# Altium PCB Board_2.PcbDoc
Units mm, origin at the board's own origin, x right, y up, seen from the top; angles counter-clockwise.
Board outline 40 x 40 mm, 2 copper layers (Top Layer, Bottom Layer); 33 components, 24 nets, 93 pads, 8 vias.
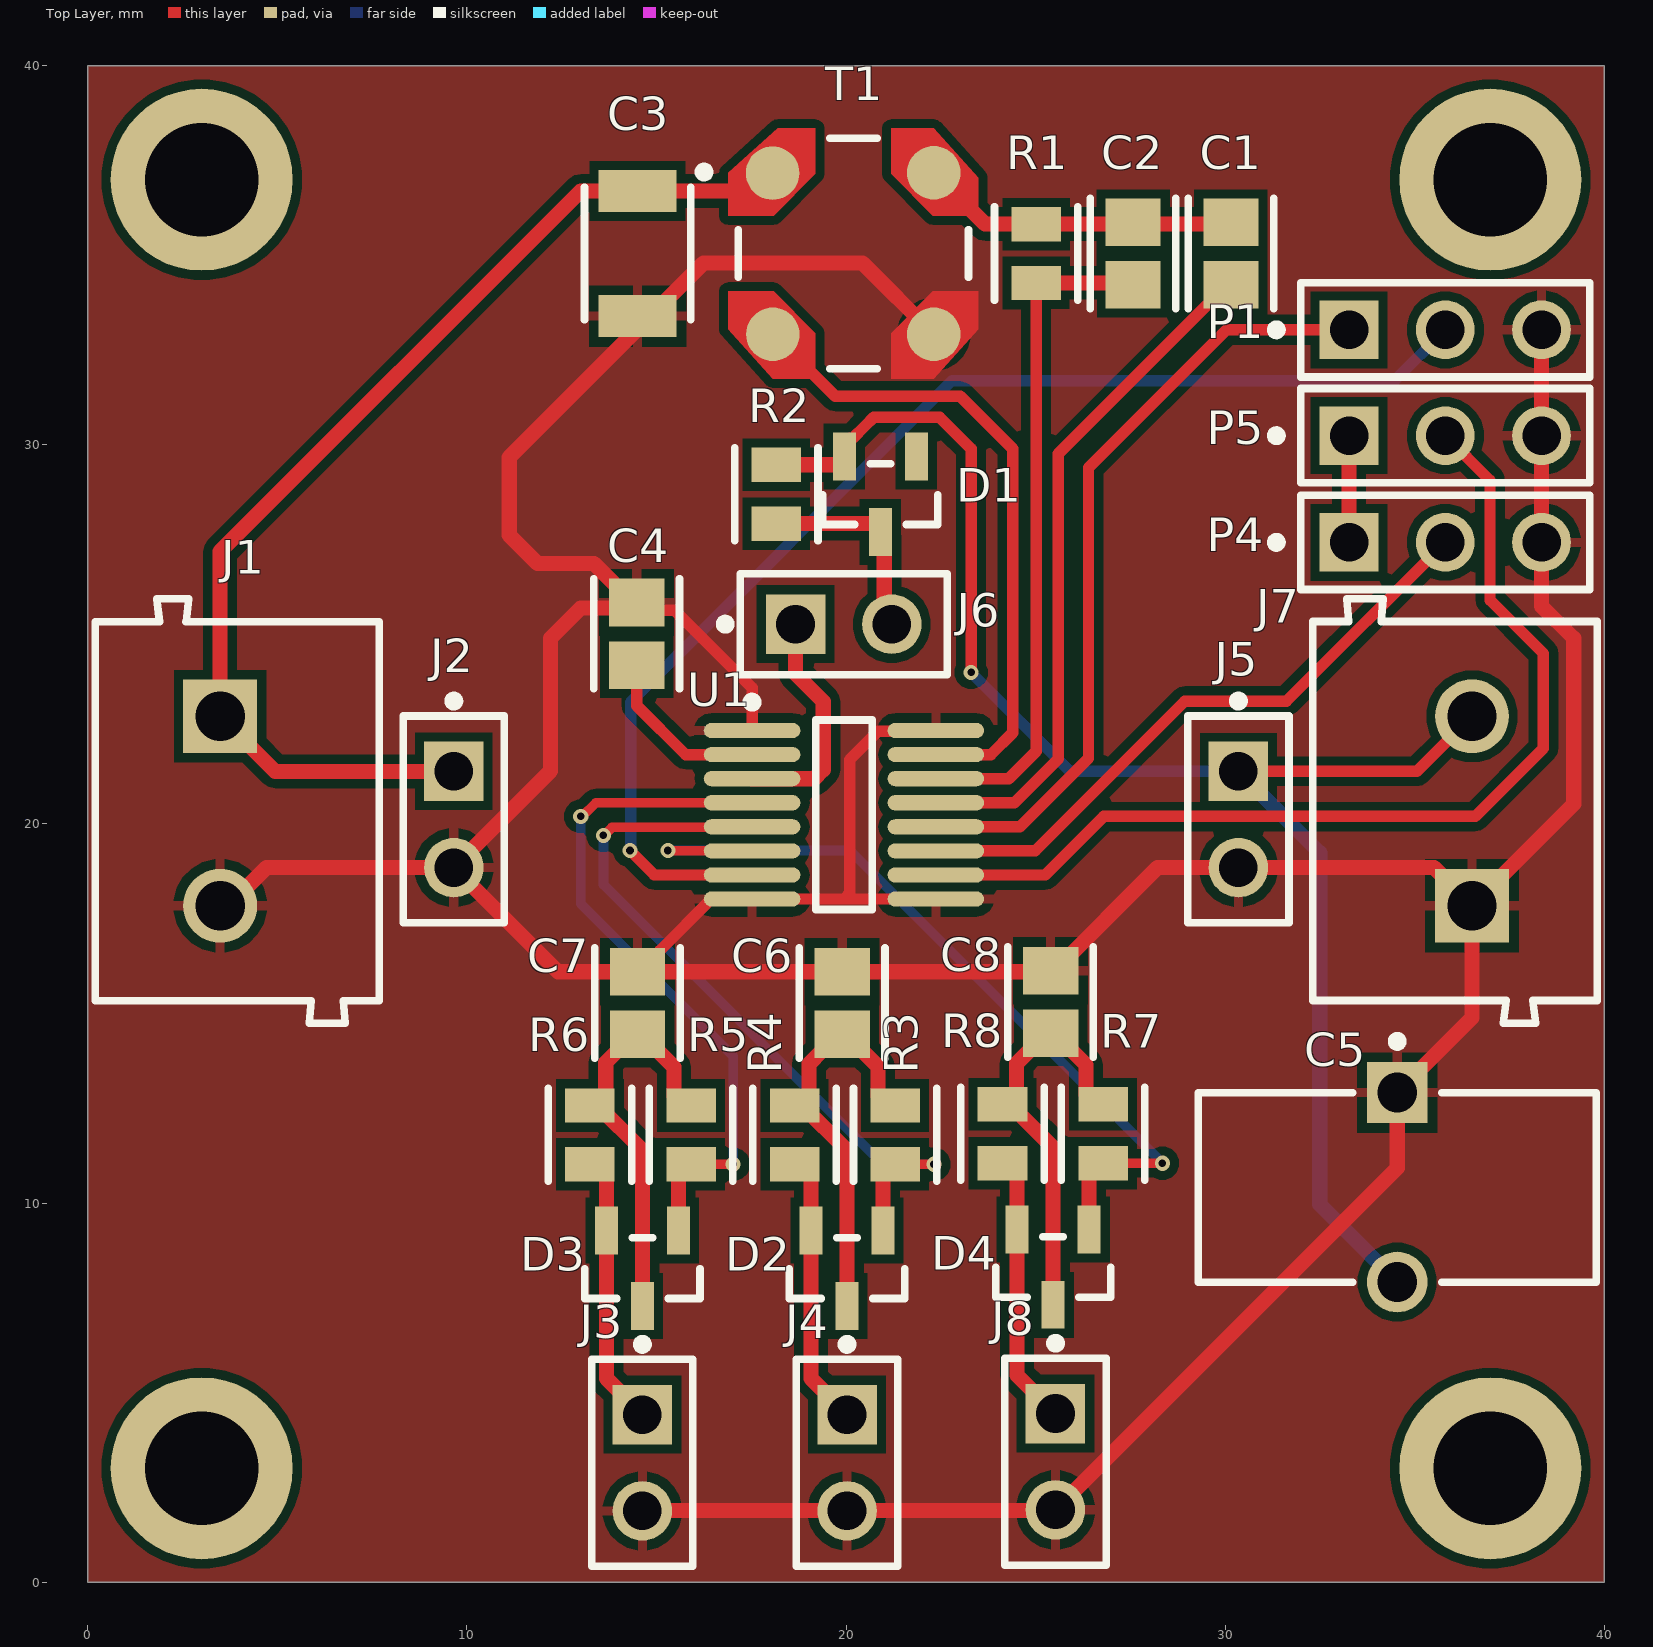
[diagram p0: Top Layer view]
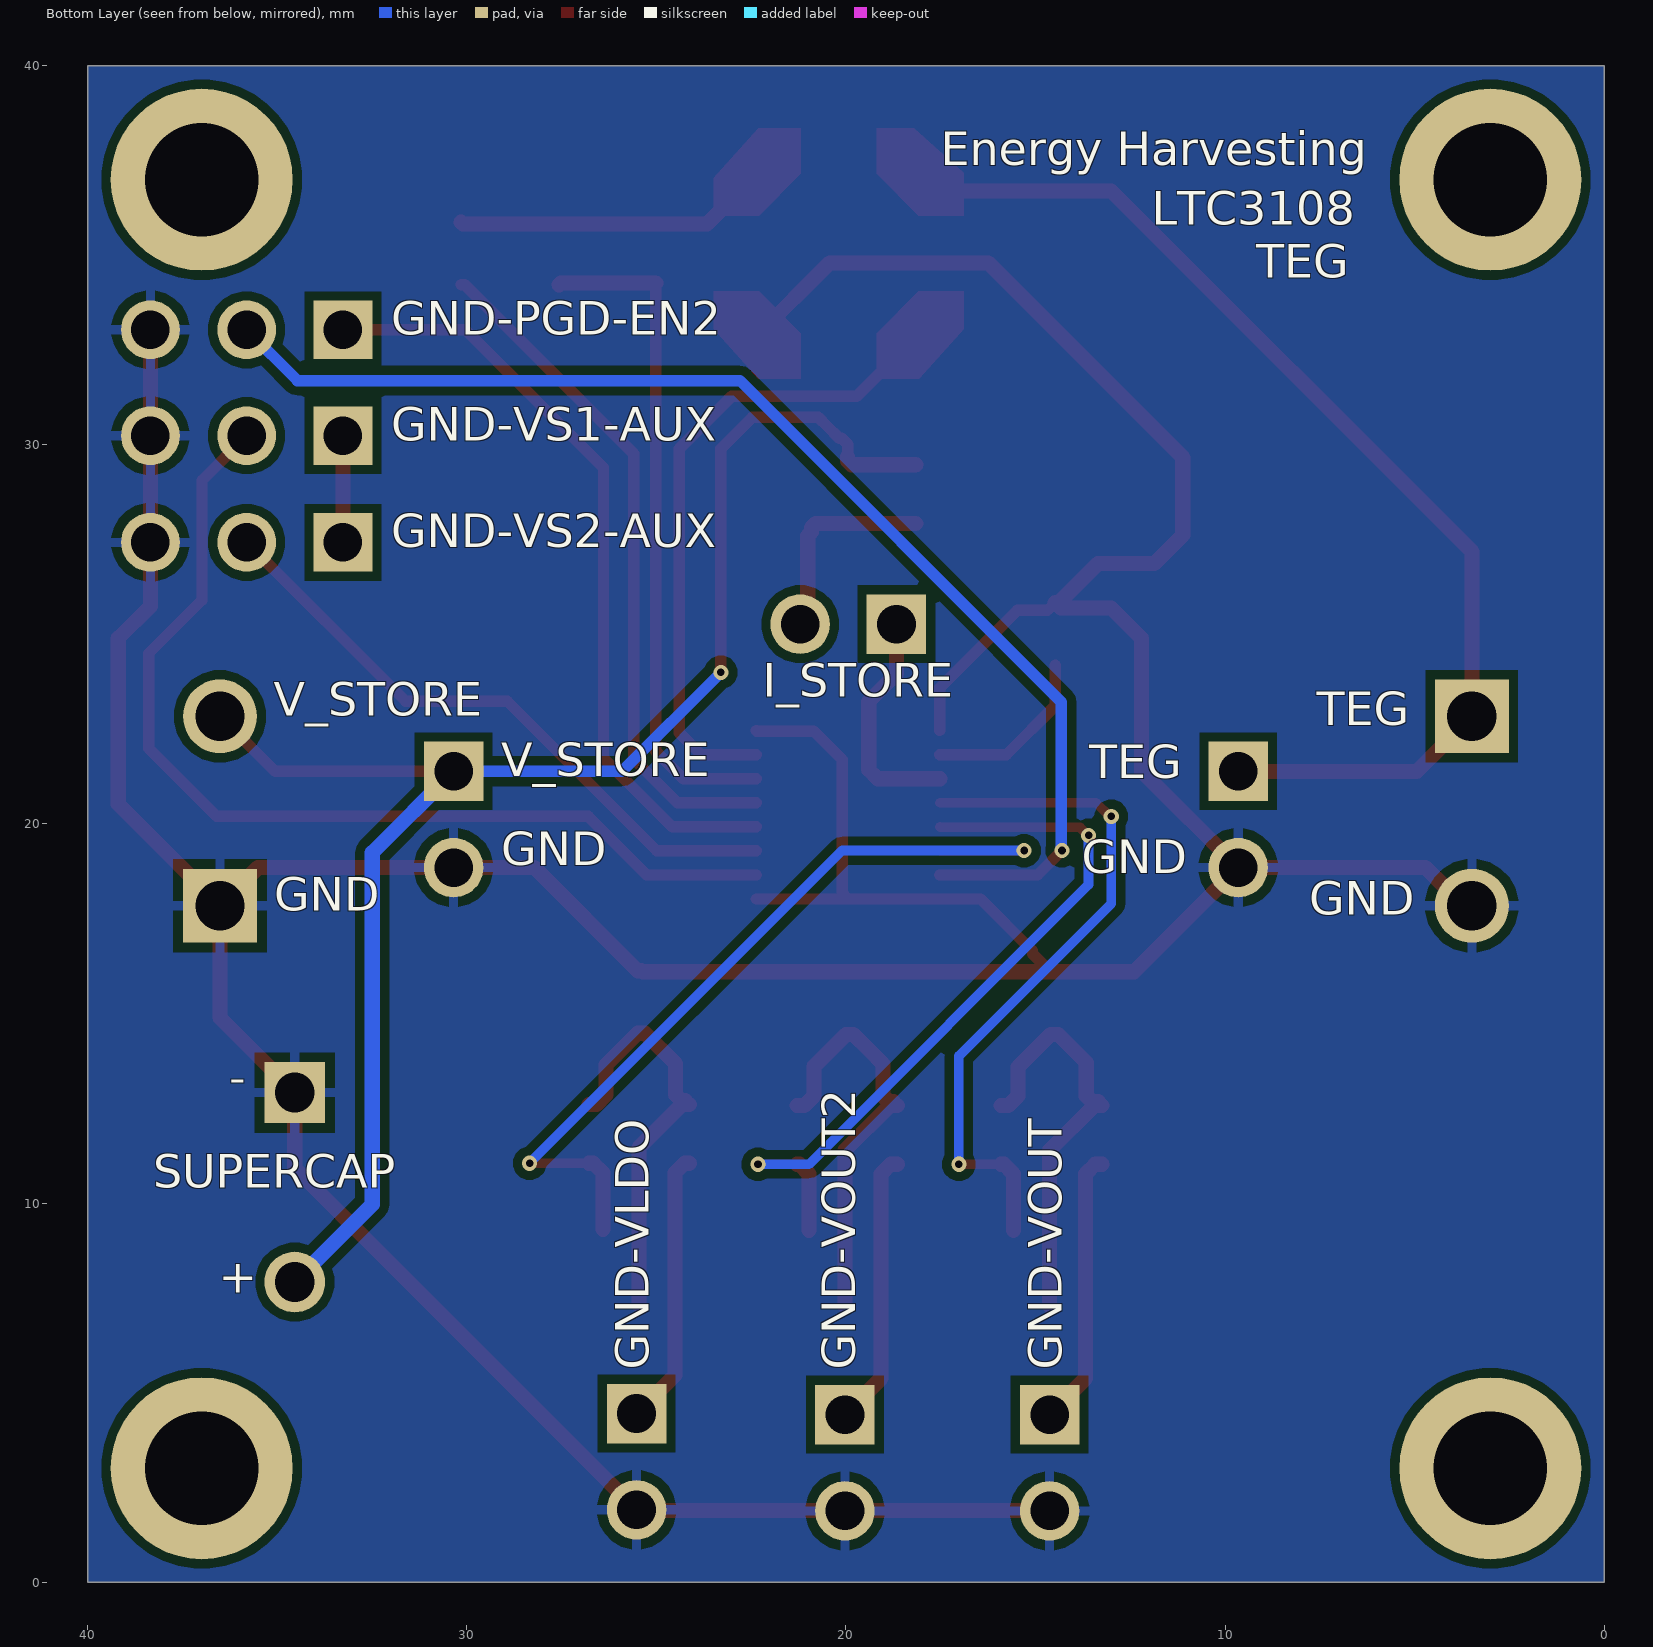
[diagram p1: Bottom Layer view, seen from below]
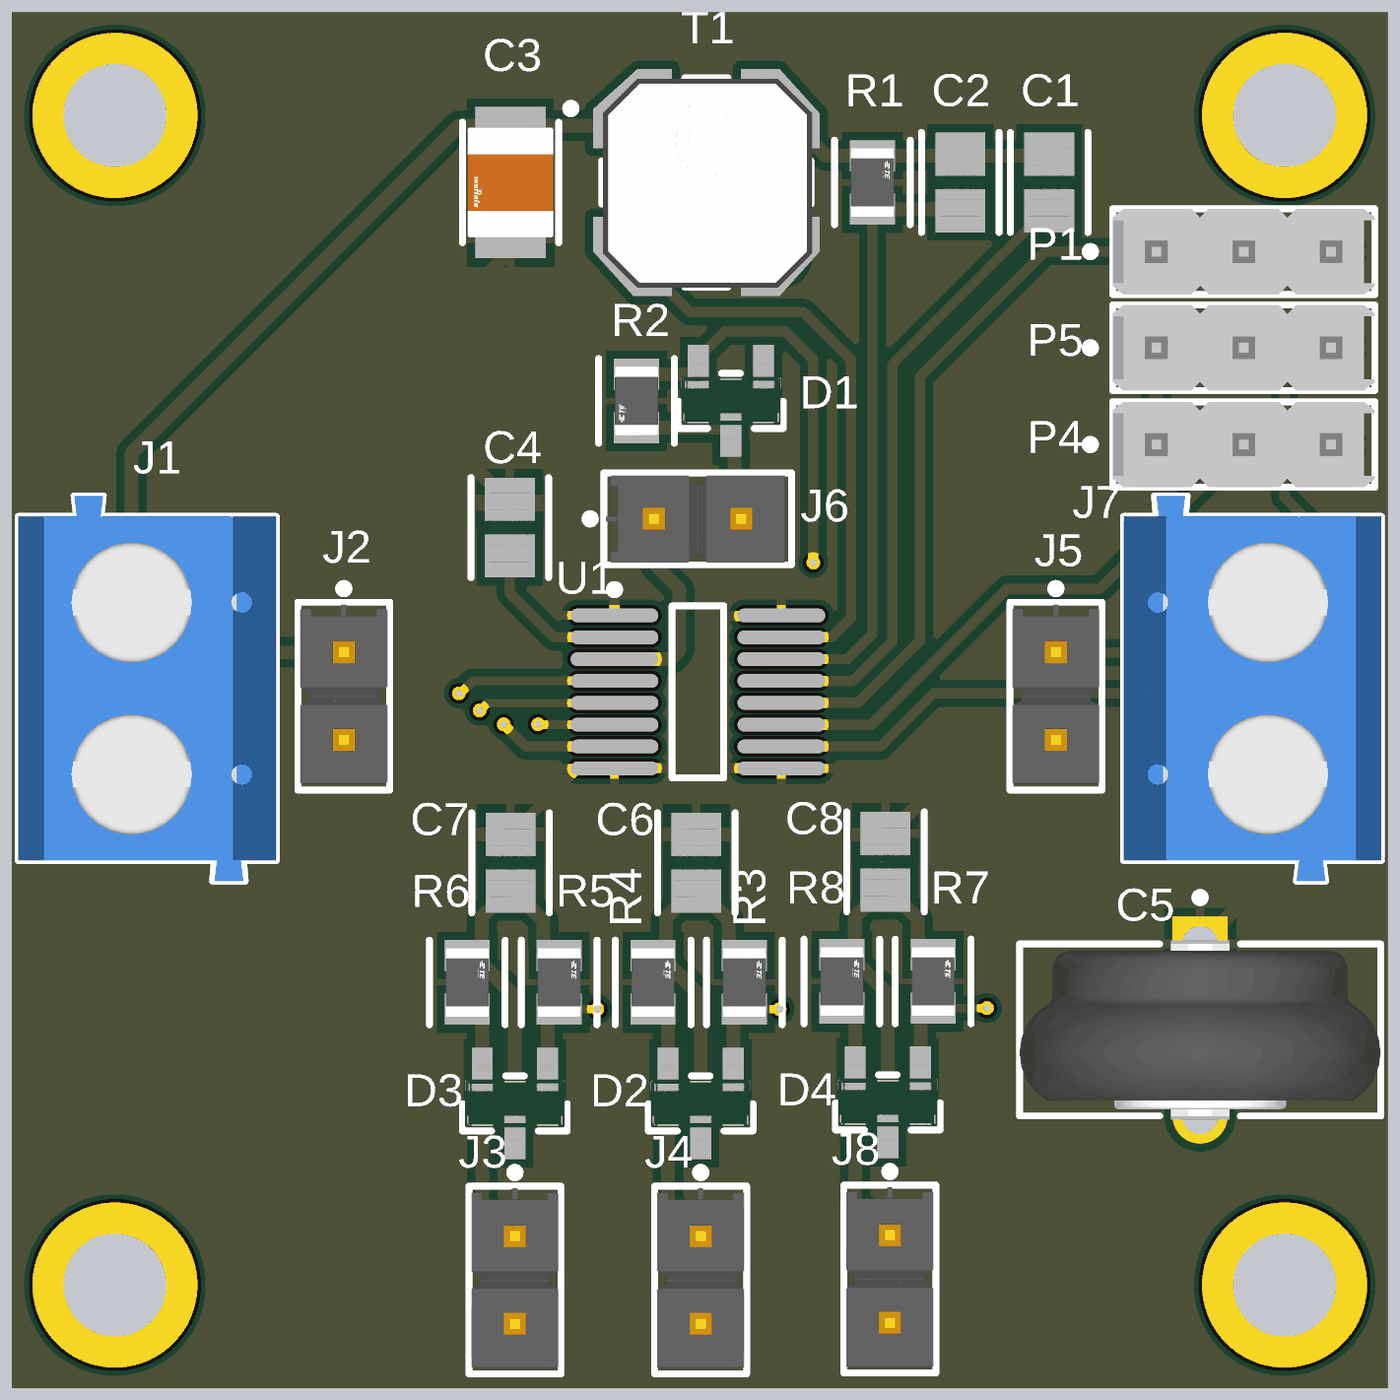
[diagram p2: 3D render of the assembled board from above, using the file's embedded part models]

## Layer stack, top to bottom
Top Solder: solder mask 0.0102, Solder Resist, Dk 3.5
Top Layer: signal copper 0.0356
Dielectric 1: dielectric 0.32, FR-4, Dk 4.8
Bottom Layer: signal copper 0.0356
Bottom Solder: solder mask 0.0102, Solder Resist, Dk 3.5

## Board outline
0,0 0,40 40,40 40,0

## Design rules (kind name [scope] priority, off if disabled: settings)
Clearance [All] p1: gap=0.235 ignorepadtopadclearanceinfootprint=FALSE
HoleSize [All] p1: absolutevalues=TRUE maxlimit=3 minlimit=0.025 maxpercent=80.000 minpercent=20.000
MinimumSolderMaskSliver [All] p1: minsoldermaskwidth=0.03
PolygonConnect [All] p1: connectstyle=Relief reliefconductorwidth=0.254 reliefentries=4 polygonreliefangle="90 Angle" airgapwidth=0.254
RoutingVias [All] p1: holewidth=0.2 width=0.4 viastyle="Through Hole" minholewidth=0.2 minwidth=0.4 maxholewidth=3 maxwidth=5
SilkToSilkClearance [All] p1: silktosilkclearance=0.02
SilkToSolderMaskClearance [IsPad] p1: minsilkscreentomaskgap=0.03 clearancetoexposedcopper=TRUE
SolderMaskExpansion [All] p1: expansion=0.102 istentingtop=FALSE
Width [All] p1: maxlimit=0.4 minlimit=0.254 preferedwidth=0.3
26 further rules are at their usual default settings.

## Components (designator, comment, footprint, x,y, rotation, side; value= is the part's Value field where it differs from the comment)
C1 "1nF" FP-CL21-IPC_B 30.158,35.052 r270 top
C2 "330pF" FP-CL21-IPC_B 27.574,35.052 r270 top
C3 "330uF" FP-GRM32E-0_3-MFG 14.5,35.052 r270 top
C4 "10uF" FP-CL21-IPC_B 14.478,25.019 r90 top
C5 "EECS0HD224V" FP-EECS0HD224V-MFG 34.544,10.414 r270 top
C6 "C" FP-CL21-IPC_B 19.9,15.274 r90 top
C7 "C" FP-CL21-IPC_B 14.5,15.274 r90 top
C8 "C" FP-CL21-IPC_B 25.4,15.303 r90 top
D1 "BAR43SFILM" FP-SOT23-3L-MFG 20.906,28.702 r270 top value=7pF
D2 "BAR43SFILM" FP-SOT23-3L-MFG 20.027,8.279 r270 top value=7pF
D3 "BAR43SFILM" FP-SOT23-3L-MFG 14.627,8.279 r270 top value=7pF
D4 "BAR43SFILM" FP-SOT23-3L-MFG 25.466,8.308 r270 top value=7pF
J1 "TEG" 691102710002 3.937,20.342 r270 top
J2 "TEG_test" FP-TSW-102-07-L-S-MFG 9.652,20.12 r270 top
J3 "VOUT" FP-TSW-102-07-L-S-MFG 14.627,3.146 r270 top
J4 "VOUT2" FP-TSW-102-07-L-S-MFG 20.027,3.146 r270 top
J5 "Vstore_test_V" FP-TSW-102-07-L-S-MFG 30.353,20.12 r270 top
J6 "Vstore_test_I" FP-TSW-102-07-L-S-MFG 19.939,25.273 r0 top
J7 "SuperCap" 691102710002 36.068,20.342 r90 top
J8 "VLDO" FP-TSW-102-07-L-S-MFG 25.527,3.175 r270 top
P1 "PGD" MOLX-22-28-4033_V 35.814,33.04 r0 top
P4 "VS1 JMP" MOLX-22-28-4033_V 35.814,27.432 r0 top
P5 "VS2 JMP" MOLX-22-28-4033_V 35.814,30.246 r0 top
R1 "500k" FP-RP732A-IPC_C 25.019,35.052 r270 top
R2 "0R" FP-RP732A-IPC_C 18.161,28.702 r90 top
R3 "0R" FP-RP732A-IPC_C 21.297,11.798 r270 top
R4 "0R" FP-RP732A-IPC_C 18.643,11.798 r270 top
R5 "0R" FP-RP732A-IPC_C 15.912,11.798 r270 top
R6 "0R" FP-RP732A-IPC_C 13.243,11.798 r270 top
R7 "0R" FP-RP732A-IPC_C 26.784,11.827 r270 top
R8 "0R" FP-RP732A-IPC_C 24.13,11.827 r270 top
T1 "LPR6235-253LMLB" FP-LPR6235-MFG 20.193,35.052 r0 top
U1 "LTC3108EGN#PBF" LT-GN-16_M 19.947,20.243 r0 top

## Footprints (in the part's own frame and the unit in brackets; to place one, negate y for a bottom-side part, rotate by r counter-clockwise, add the part's x,y. Pads: shape width x height; smd on the part's side, far side on the other; paste and mask are expansions set on the pad)
691102710002 [mm] "5,00mm - modular - blue - Horizontal entry with pressure clamp - 9,9 mm height - 02p"
  rect 1.95x1.95 hole 1.3: 1(-2.5,-0.45)
  round 1.95 hole 1.3: 2(2.5,-0.45)
  silkscreen extent -5.6,-3.75 5.6,3.75, body extent -5.6,-3.75 5.6,3.75, height 9.96
FP-CL21-IPC_B [mm]
  rect 1.255x1.456 smd paste+0 mask+0: 1(-0.826,0) 2(0.826,0)
  silkscreen extent -1.45,-1.13 1.45,1.13, body extent -1.7,-0.98 1.7,0.98, height 0.25
FP-EECS0HD224V-MFG [mm]
  rect 1.6x1.6 hole 1.05 paste-1000 mask+0: 1(-2.5,0)
  round 1.6 hole 1.05 paste-1000 mask+0: 2(2.5,0)
  silkscreen extent -3.97,-5.25 2.5,5.25, body extent -3.4,-5.35 3.4,5.35, height 0.25
FP-GRM32E-0_3-MFG [mm]
  rect 1.1x2.05 smd paste+0 mask+0: 1(-1.65,0) 2(1.65,0)
  silkscreen extent -1.75,-1.4 1.75,1.4, body extent -2.3,-1.5 2.3,1.5, height 0.25
FP-LPR6235-MFG [mm]
  round 1.413 smd paste+0 mask+0: 1(-2.131,2.123) 2(-2.123,-2.131) 3(2.123,-2.131) 4(2.123,2.131)
  Top Layer region: -3.3,-1 -2.1,-1 -1,-2.1 -1,-3.3 -2.125,-3.3 -3.3,-2 -3.3,-1
  Top Layer region: 3.3,-1 2.1,-1 1,-2.1 1,-3.3 2.125,-3.3 3.3,-2 3.3,-1
  Top Layer region: 3.3,1 2.1,1 1,2.1 1,3.3 2.125,3.3 3.3,2 3.3,1
  Top Layer region: -1,3.3 -1,2.1 -2.1,1 -3.3,1 -3.3,2.125 -2,3.3 -1,3.3
  silkscreen extent -4.06,-3.04 3.04,3.04, body extent -3.4,-3.4 3.4,3.4, height 0.25
FP-RP732A-IPC_C [mm]
  rect 0.906x1.308 smd paste+0 mask+0: 1(-0.776,0) 2(0.776,0)
  silkscreen extent -1.23,-1.1 1.23,1.1, body extent -1.33,-0.8 1.33,0.8, height 0.25
FP-SOT23-3L-MFG [mm]
  rect 1.26x0.61 smd paste+0 mask+0: 1(-0.995,0.95) 2(-0.995,-0.95) 3(0.995,0)
  silkscreen extent -0.8,-1.52 0.8,1.52, body extent -1.73,-1.62 1.73,1.62, height 0.25
FP-TSW-102-07-L-S-MFG [mm]
  rect 1.57x1.57 hole 1.02 paste-1000 mask+0: 1(-1.27,0)
  round 1.57 hole 1.02 paste-1000 mask+0: 2(1.27,0)
  silkscreen extent -3.25,-1.34 2.73,1.34, body extent -2.83,-1.44 2.83,1.44, height 0.25
LT-GN-16_M [mm] "SOP, 16-Leads, Body 5x4mm, Pitch 0.635mm, IPC Low Density"
  oval 2.55x0.4 smd: 1(-2.425,2.222) 2(-2.425,1.587) 3(-2.425,0.953) 4(-2.425,0.318) 5(-2.425,-0.318) 6(-2.425,-0.953) 7(-2.425,-1.587) 8(-2.425,-2.222) 9(2.425,-2.222) 10(2.425,-1.587) 11(2.425,-0.953) 12(2.425,-0.318) 13(2.425,0.318) 14(2.425,0.953) 15(2.425,1.587) 16(2.425,2.222)
  silkscreen extent -2.55,-2.5 0.75,3.1, body extent -2,-2.5 2,2.5, height 1.75
MOLX-22-28-4033_V [mm] "THD, 3-Leads, Body 7.62x2.49mm, Pitch 2.54mm"
  rect 1.55x1.55 hole 1.02: 1(-2.54,0)
  round 1.55 hole 1.02: 2(0,0) 3(2.54,0)
  silkscreen extent -4.58,-1.24 3.81,1.24, body extent -3.81,-1.24 3.81,1.24, height 8.38

## Part data
C1 C2 C4 C6 C7 C8: library part CMP-13271-001454-1, "CL21 Series 0805 22uF 6.3V ±20% Tolerance X5R Multilayer Ceramic Chip Capacitor", Capacitance=22uF, Case Code (Imperial)=0805, Case Code (Metric)=2012, Dielectric=X5R, Max Operating Temperature=85°C, Min Operating Temperature=-55°C, Package Quantity=1, Tolerance=20%, Voltage Rating=6.3V, Case/Package=0805, Depth=1.25mm, Height=0.85mm, Lead Free="Lead Free", Length=2mm, Mount="Surface Mount", Packaging="Tape and Reel", Radiation Hardening=No, Thickness=0.037inch, Width=0.049inch
C3: library part CMP-06035-014163-1, "Chip Multilayer Ceramic Capacitors for General Purpose, 1210, 330uF, X5R, 15%, 20%, 4V", Case Code (Imperial)=1210, Case Code (Metric)=3225, Dielectric=X5R, Max Operating Temperature=85°C, Min Operating Temperature=-55°C, Tolerance=20%, Voltage Rating=4V, Capacitance=330uF, Case/Package=1210, Length=0.126inch, Mount="Surface Mount", Packaging="Tape and Reel", Thickness=0.11inch, Voltage Rating (DC)=4V, Width=0.098inch
C5: library part CMP-05436-000001-1, "CAP 220MF -20% +80% 5.5V T/H", Capacitance=220mF, Case/Package=Radial, Dielectric Material=Aluminium, ESR (Equivalent Series Resistance)=75R, Max Operating Temperature=70°C, Min Operating Temperature=-25°C, Package Quantity=200, Tolerance=80%, Voltage=500V, Voltage Rating=5.5V, Body Diameter=10.5mm, Construction=Cylindrical, Depth=5mm, Diameter=10.5mm, Height=11.5mm, Height - Seated (Max)=0.453inch, Lead Diameter=0.8mm, Lead Free="Lead Free", Lead Length=3mm, Lead Pitch=5mm, Length=11.5mm, Life (Hours)=1000Hour, Mount="Through Hole", Packaging=Bulk, Radiation Hardening=No, REACH SVHC="No SVHC", RoHS Compliant=Yes, Series=SD, Termination="Through Hole", Voltage Rating (DC)=5.5V, Width=5mm
D1 D2 D3 D4: library part CMP-2000-05915-2, "DIODE ARRAY SCHOTTKY 30V SOT23-3", Capacitance=7pF, Forward Current=0.1A, Manufacturer=STMicroelectronics, Max Junction Temp=+150°C, Max Repetitive Reverse Voltage=30V, Max Surge Forward Current=0.75A, Package=SOT23-3L, Peak Reverse Current=0.5uA, Temperature="to +150°C", Automotive=No, Category=Diode, ComponentLink2Description=Datasheet, ComponentLink2URL=https://www.st.com/resource/en/datasheet/bar43.pdf, Device Class L1="Discrete Semiconductors", Device Class L2=Diodes, Device Class L3="Schottky Diodes", Digikey Description="DIODE ARRAY SCHOTTKY 30V SOT23-3", Height=1.5mm, Lead Free=Yes, Manufacturer Part Number=BAR43SFILM, Mouser Description="Schottky Diodes & Rectifiers 100mA 30 Volt", Octopart=https://octopart.com/bar43sfilm-stmicroelectronics-39549077, RoHS=TRUE, Standoff Height=0mm, Temperature Range High=+150°C
J1 J7: library part CMP-1502-03258-1, "Series 102 - 5.00 mm Horizontal Entry Modular with Pressure Clamp WR-TBL, 2 pin", Manufacturer="Wurth Elektronik", Operating Temperature=-40to105degC, Package Reference=691102710002, Datasheet URL=http://katalog.we-online.de/em/datasheet/6911027100xx.pdf, Manufacturer URL=http://www.we-online.de, Mounting Technology=THT, Packaging=Box, Part Number=691102710002, Pin Number=2, Pitch=5.00mm, Publisher=WurthElektronik
J2 J3 J4 J5 J6 J8: library part CMP-02766-001428-1, "CONN HEADER VERT 2POS 2.54MM", Color=Black, Current Rating=7.6A, Max Operating Temperature=125°C, Max Voltage Rating (AC)=550V, Min Operating Temperature=-55°C, Package Quantity=1, Connector Type="Male Pin", Contact Material=Bronze, Contact Mating Length=0.23inch, Contact Plating=Gold, Contact Type="Male Pin", Depth=2.54mm, Gender=Male, Housing Color=Black, Housing Material=Polyester, Lead Free="Lead Free", Length=5.08mm, Max Current Rating=7.6A, Mount="Through Hole", Number of Contacts=2, Number of Positions=2, Number of Rows=1, Orientation=Straight, Packaging=Bulk, Pitch=2.54mm, Radiation Hardening=No, REACH SVHC="No SVHC", RoHS Compliant=Yes, Series=TSW, Termination=Solder, Voltage Rating=550V, Width=2.54mm
P1 P4 P5: library part CMP-1676-00001-5, "Male Header, Pitch 2.54 mm, 1 x 3 Position, Height 8.38 mm, Tail Length 3.18 mm, RoHS, Bulk", Colour=Black, Current Rating="4 A", Manufacturer=Molex, Max Operating Temperature="75 degC", Min Operating Temperature="0 degC", Package Quantity=1, Voltage Rating="250 V", ComponentLink1Description="Manufacturer URL", ComponentLink1URL=http://www.molex.com/, ComponentLink2Description=Datasheet, ComponentLink2URL=http://www.molex.com/pdm_docs/sd/022284033_sd.pdf, Contact Finish=Gold, Contact Material=Brass, Contact Plating=Gold, DatasheetVersion="Rev. G, 01/2012", Height="8.38 mm", Lead Pitch="0.1 inch", Length="7.62 mm", Mount="Through Hole", Mounting Technology="Through Hole", PackageDescription="Male Header, Pitch 2.54 mm, 1 x 3 Position, Height 8.38 mm, Tail Length 3.18 mm", PackageReference=22-28-4033, Packaging=Bulk, Pins=3, REACH SVHC=Unknown, RoHSCompliant=true, Rows=1
R1 R2 R3 R4 R5 R6 R7 R8: library part CMP-03211-009539-2, "Surface Mount Resistors, Precision Resistor, 2 Terminations, Size Code 0805, Cut Tape Length, .1%, Thin Film, 10K 0.1% 10PPM", Case Code (Imperial)=0805, Case Code (Metric)=2012, Max Operating Temperature=155°C, Min Operating Temperature=-55°C, Number of Resistors=1, Package Quantity=1000, Power Rating=125mW, Resistance=39.2kR, Temperature Coefficient=15ppm/°C, Tolerance=0.1%, Voltage Rating=150V, Case/Package=0805, ELV=Compliant, Height=0.55mm, Length=2mm, Mount="Surface Mount", Number of Terminations=2, Packaging="Tape and Reel", Termination=Solder, Weight=0.000194oz, Width=1.25mm
T1: library part CMP-11284-000017-1, "Coupled Inductors Mini Step-up Xfmr SEE PART COMMENT TAB", Ambient Temperature Range High=+85°C, Ambient Temperature Range Low=-40°C, Frequency=100kHz, Inductance Primary=25uH, Isolation Voltage=300Vrms, Manufacturer=Coilcraft, Package=LPR6235, Primary Resistance=0.74Ω, Sec Resistance=13.7Ω, Automotive=No, Category=Trans, ComponentLink2Description=Datasheet, ComponentLink2URL=https://www.coilcraft.com/pdfs/lpr6235.pdf, Device Class L1="Passive Components", Device Class L2=Transformers, Device Class L3=unset, Height=3.5mm, Lead Free=Yes, Manufacturer Part Number=LPR6235-253LMLB, Mouser Description="Coupled Inductors Mini Step-up Xfmr SEE PART COMMENT TAB", Octopart=https://octopart.com/lpr6235-253lmlb-coilcraft-14935593, RoHS=TRUE, Turns Ratio=1:10
U1: library part CMP-0473-00093-1, "Ultralow Voltage Step-Up Converter and Power Manager, 16-pin SOP (GN-16), -40 to 125 degC, Pb-Free", Manufacturer="Linear Technology", ComponentLink1Description="Manufacturer URL", ComponentLink1URL=http://www.linear.com/, ComponentLink2Description=Datasheet, ComponentLink2URL=http://cds.linear.com/docs/en/datasheet/3108fb.pdf, ComponentLink3Description="Package Specification", ComponentLink3URL=http://cds.linear.com/docs/en/packaging/05081641_B_GN16.pdf, DatasheetVersion="Rev. B", Energy Source=Thermoelectric, Mounting Technology="Surface Mount", Number of Outputs=3, PackageDescription="16-Pin Plastic SSOP, Body 4.9 x 3.9 mm, Pitch 0.635 mm", PackageReference=GN-16, PackageVersion="Rev. B, 03/2012", PartNumber=LTC3108EGN#PBF, RoHS=TRUE, Topology="Boost, LDO", Vin Max(V)=0.5, Vin Min(V)=0.02, Vout Max(V)=5

## Free pads (board coordinates)
  round 4.8 hole 3: 5(3,3) 5(3,37) 5(37,3) 5(37,37)

## Via types
v1: diameter 0.4, hole 0.2, Top Layer to Bottom Layer, 8 vias

## Nets (pads, with @x,y where several pads share a name; then routed paths per layer and width w, separated by ;. In a path a pad name is that pad's centre, name@x,y a point inside that pad or via, vN(x,y) a via of type N, cw(c..) or ccw(c..) an arc to the next point about the centre after c; other vN are vias at no path point)
GND: C3.2 C4.2 C5.1 C6.2 C7.2 C8.2 J1.2 J2.2 J3.2 J4.2 J5.2 J7.1 J8.2 P1.3 P4.3 P5.3 T1.3 U1.1 U1.8 U1.9 U1.16 | length 134.2
  Top Layer w0.3: C4.2 14.686,25.636 15.48,25.636 17.522,23.595 U1.1 ; C7.2 14.601,16.1 15.078,16.577 15.078,16.652 16.447,18.021 U1.8 19.947,18.021 ; U1.9 19.947,18.021 ; U1.16 22.353,22.447 20.847,22.447 20.1,21.7 20.1,18.174 19.947,18.021
  Top Layer w0.4: J1.2 3.699,17.842 4.707,18.85 J2.2 ; C4.2@14.377,25.845 13.35,26.872 11.863,26.872 11.113,27.622 11.113,28.647 11.113,29.672 16.241,34.8 20.437,34.8 T1.3 ; C4.2 14.333,25.7 13,25.7 12.2,24.9 12.2,21.398 J2.2 ; C7.2 12.402,16.1 J2.2 ; C7.2@14.601,16.1 C6.2 25.371,16.1 C8.2 25.501,16.129 28.221,18.85 J5.2 35.511,18.85 J7.1 ; J3.2 14.642,1.891 25.513,1.891 J8.2 34.544,10.922 C5.1 36.518,14.888 J7.1 ; P1.3 P5.3 P4.3 38.354,25.746 39.2,24.9 39.2,20.524 J7.1
NetC1_1: C1.1 C2.1 R1.1 T1.4 | length 8.4
  Top Layer w0.4: T1.4 23.671,35.828 R1.1 30.108,35.828 C1.1
NetC1_2: C1.2 U1.13 | length 18.2
  Top Layer w0.3: U1.13 24.444,20.561 25.6,21.717 25.6,29.769 30.057,34.226 C1.2
NetC2_2: C2.2 R1.2 U1.14 | length 17.9
  Top Layer w0.3: U1.14 24.296,21.196 25.019,21.919 R1.2
  Top Layer w0.4: R1.2 27.525,34.276 C2.2
NetC3_1: C3.1 J1.1 J2.1 T1.1 | length 29.8
  Top Layer w0.4: J2.1 4.939,21.39 J1.1 3.487,27.187 13.002,36.702 14.975,36.702 17.314,36.702 17.788,37.175 T1.1
NetC4_1: C4.1 U1.2 | length 4.6
  Top Layer w0.3: C4.1 14.478,23.122 15.769,21.831 U1.2
NetC5_2: C5.2 D1.2 J5.1 J7.2 R2.2 | length 42.3
  Top Layer w0.3: D1.2 19.956,30.022 20.111,30.177 20.177,30.177 20.5,30.5 ; 20.5,30.5 20.731,30.731 22.469,30.731 23.3,29.9 v1(23.3,24) ; J5.1 35.066,21.39 J7.2
  Top Layer w0.4: R2.2 19.851,29.478 19.956,29.583 D1.2
  Bottom Layer w0.3: v1(23.3,24) 25.91,21.39 J5.1
  Bottom Layer w0.4: J5.1 32.5,19.243 32.5,9.958 C5.2
NetC6_1: C6.1 D2.3 R3.1 R4.1 | length 11
  Top Layer w0.4: R4.1 18.844,12.574 20.027,11.39 D2.3 ; R4.1@18.743,12.674 18.87,12.674 19.022,12.827 19.022,13.671 19.372,14.021 19.799,14.448 20.001,14.448 20.843,13.606 20.843,12.827 21.096,12.574 R3.1
NetC7_1: C7.1 D3.3 R5.1 R6.1 | length 11
  Top Layer w0.4: R6.1 13.444,12.574 14.627,11.39 D3.3 ; R6.1@13.343,12.674 13.509,12.674 13.661,12.827 13.661,13.71 14.399,14.448 14.601,14.448 15.458,13.591 15.458,12.827 15.711,12.574 R5.1
NetC8_1: C8.1 D4.3 R7.1 R8.1 | length 11
  Top Layer w0.4: R8.1 24.331,12.603 25.466,11.468 D4.3 ; R8.1@24.231,12.703 24.348,12.703 24.5,12.856 24.5,13.678 25.299,14.477 25.501,14.477 26.33,13.648 26.33,12.856 26.583,12.603 R7.1
NetD1_3: D1.3 J6.2 R2.1 | length 5.5
  Top Layer w0.4: R2.1 20.801,27.926 20.906,27.821 D1.3 21.011,27.602 21.011,25.471 J6.2
NetD2_2: D2.2 J4.1 R4.2 | length 7.3
  Top Layer w0.4: R4.2 18.824,11.022 19.077,10.768 D2.2 19.077,5.366 J4.1
NetD3_2: D3.2 J3.1 R6.2 | length 7.3
  Top Layer w0.4: R6.2 13.424,11.022 13.677,10.768 D3.2 13.677,5.366 J3.1
NetD4_2: D4.2 J8.1 R8.2 | length 7.3
  Top Layer w0.4: R8.2 24.263,11.051 24.516,10.797 D4.2 24.516,5.456 J8.1
NetJ6_1: J6.1 U1.3 | length 6.1
  Top Layer w0.4: U1.3 19.166,21.196 19.4,21.43 19.4,23.232 18.669,23.963 J6.1
NetT1_2: T1.2 U1.15 | length 17.3
  Top Layer w0.3: T1.2 18.079,32.921 19.715,31.285 23.015,31.285 24.4,29.9 24.4,22.406 23.824,21.831 U1.15
PGD: P1.2 U1.7 | length 33
  Top Layer w0.3: v1(14.3,19.3) 14.944,18.656 U1.7
  Bottom Layer w0.3: v1(14.3,19.3) 14.319,19.319 14.319,23.219 22.8,31.7 34.474,31.7 P1.2
VAUX: P4.1 P5.1 | length 2.8
  Top Layer w0.4: P4.1 P5.1
VLDO: D4.1 R7.2 U1.6 | length 22.2
  Top Layer w0.254: v1(15.3,19.3) 15.305,19.295 17.517,19.295 U1.6 ; R7.2 v1(28.349,11.051)
  Top Layer w0.4: D4.1 26.416,10.797 26.669,11.051 R7.2
  Bottom Layer w0.254: v1(15.3,19.3) 20.1,19.3 v1(28.349,11.051)
VOUT: D3.1 R5.2 U1.4 | length 18.6
  Top Layer w0.254: v1(13,20.2) 13.04,20.2 13.4,20.561 U1.4 ; R5.2 v1(17.022,11.022)
  Top Layer w0.4: D3.1 15.577,10.768 15.83,11.022 R5.2
  Bottom Layer w0.254: v1(13,20.2) 13,17.9 17.022,13.878 v1(17.022,11.022)
VOUT2: D2.1 R3.2 U1.5 | length 20
  Top Layer w0.254: v1(13.6,19.7) 13.609,19.7 13.822,19.913 17.509,19.913 U1.5 ; R3.2 v1(22.322,11.022)
  Top Layer w0.4: D2.1 20.977,10.768 21.23,11.022 R3.2
  Bottom Layer w0.254: v1(13.6,19.7) 13.6,18.4 20.978,11.022 v1(22.322,11.022)
VOUT2_EN: P1.1 U1.12 | length 20.8
  Top Layer w0.3: U1.12 24.593,19.926 26.4,21.733 26.4,29.4 30.04,33.04 P1.1
VS1: P4.2 U1.11 | length 16.8
  Top Layer w0.3: U1.11 24.991,19.291 28.942,23.242 31.624,23.242 P4.2
VS2: P5.2 U1.10 | length 26.7
  Top Layer w0.3: U1.10 25.256,18.656 26.801,20.201 36.601,20.201 38.4,22 38.4,24.5 36.993,25.907 36.993,29.067 P5.2
pads on no net: D1.1

## Polygon pours and split planes (outlines as drawn)
GND on Bottom Layer "NONET_L-01_P-001" (solid, pour order 1): 0,0 40,0 40,40 0,40
GND on Top Layer "NONET_L-01_P-001" (solid, pour order 0): 0,0 40,0 40,40 0,40

## Silkscreen, mask and mechanical layers (free items; w line width, h text height)
Bottom Overlay:
  text "Energy Harvesting" at 17.5,37.087 h1.52
  text "LTC3108" at 11.935,35.516 h1.52
  text "TEG" at 9.173,34.116 h1.52
  text "GND-PGD-EN2" at 32,32.616 h1.52
  text "GND-VS1-AUX" at 32,29.816 h1.52
  text "GND-VS2-AUX" at 32,27.016 h1.52
  text "I_STORE" at 22.2,23.07 h1.52
  text "V_STORE" at 35.099,22.57 h1.52
  text "TEG" at 7.584,22.316 h1.52
  text "V_STORE" at 29.099,20.97 h1.52
  text "TEG" at 13.584,20.916 h1.52
  text "GND" at 29.1,18.616 h1.52
  text "GND" at 13.781,18.416 h1.52
  text "GND" at 35.081,17.416 h1.52
  text "GND" at 7.781,17.316 h1.52
  text "-" at 36.267,12.607 h1.52
  text "SUPERCAP" at 38.276,10.116 h1.52
  text "+" at 36.545,7.342 h1.52
  text "GND-VOUT" at 14.016,5.6 h1.52 r270
  text "GND-VOUT2" at 19.466,5.6 h1.52 r270
  text "GND-VLDO" at 24.916,5.6 h1.52 r270
Mechanical 1:
  the board outline again, w0.254